# Altium PCB SnekHeaderBoard.PcbDoc
Units mm, origin at the board's own origin, x right, y up, seen from the top; angles counter-clockwise.
Board outline 70 x 40 mm, 2 copper layers (Top Layer, Bottom Layer); 8 components, 17 nets, 54 pads, 0 vias.
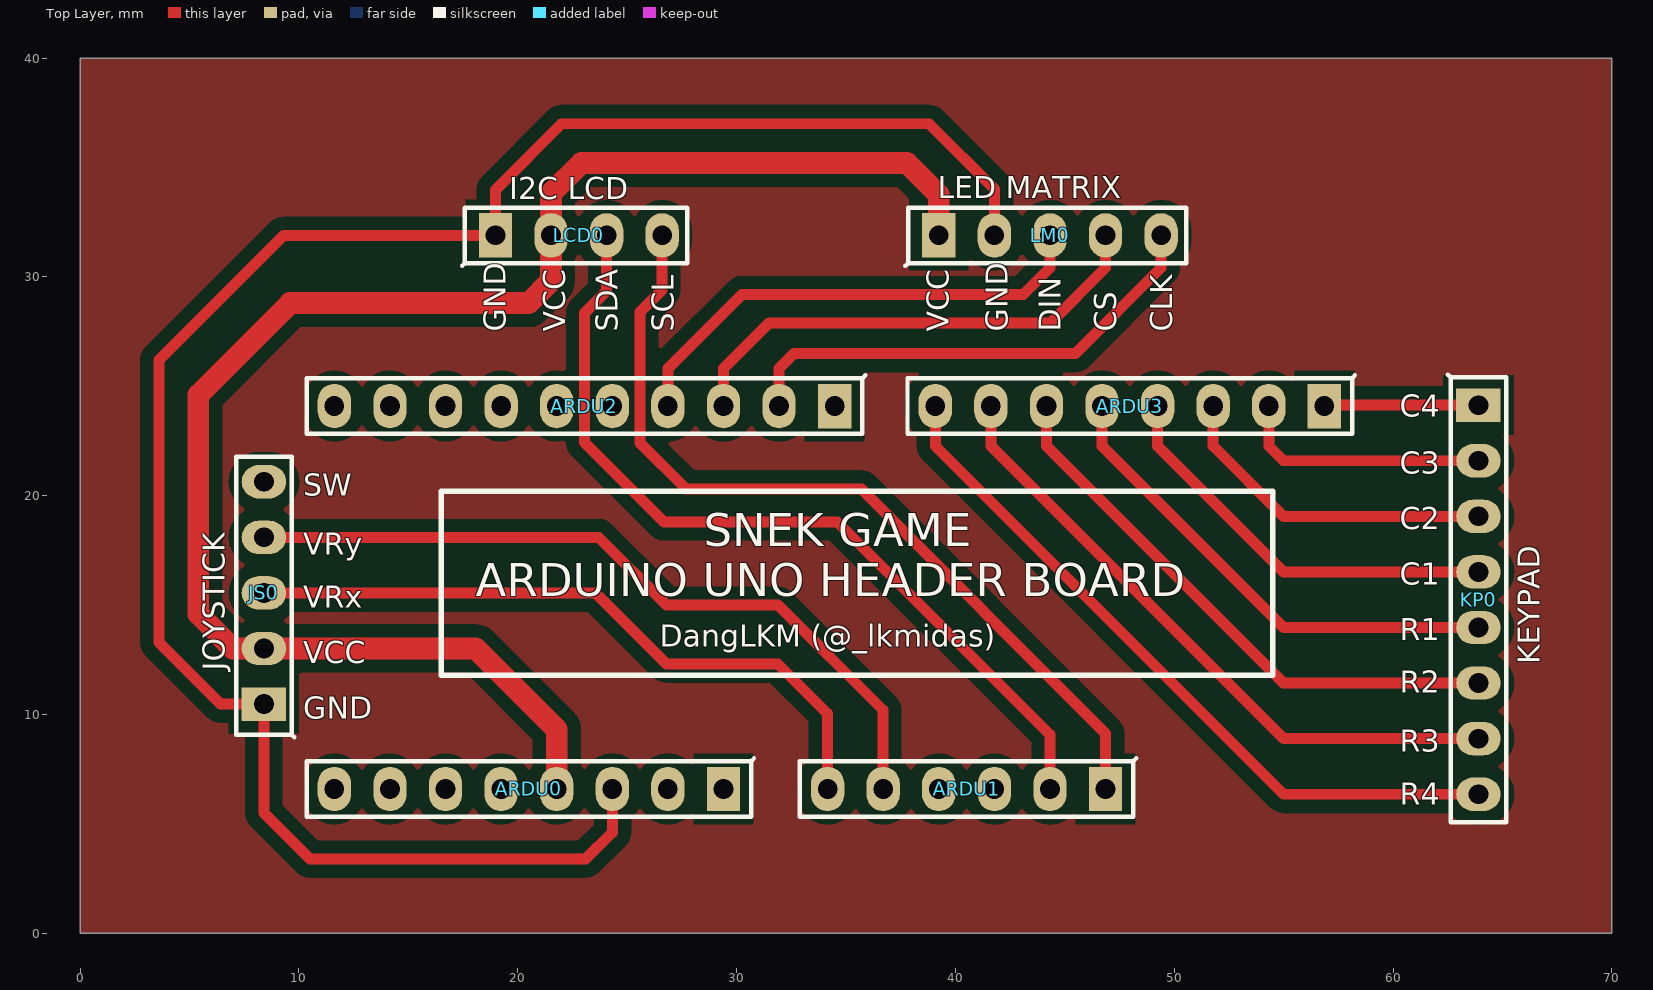
[diagram p0: Top Layer view]
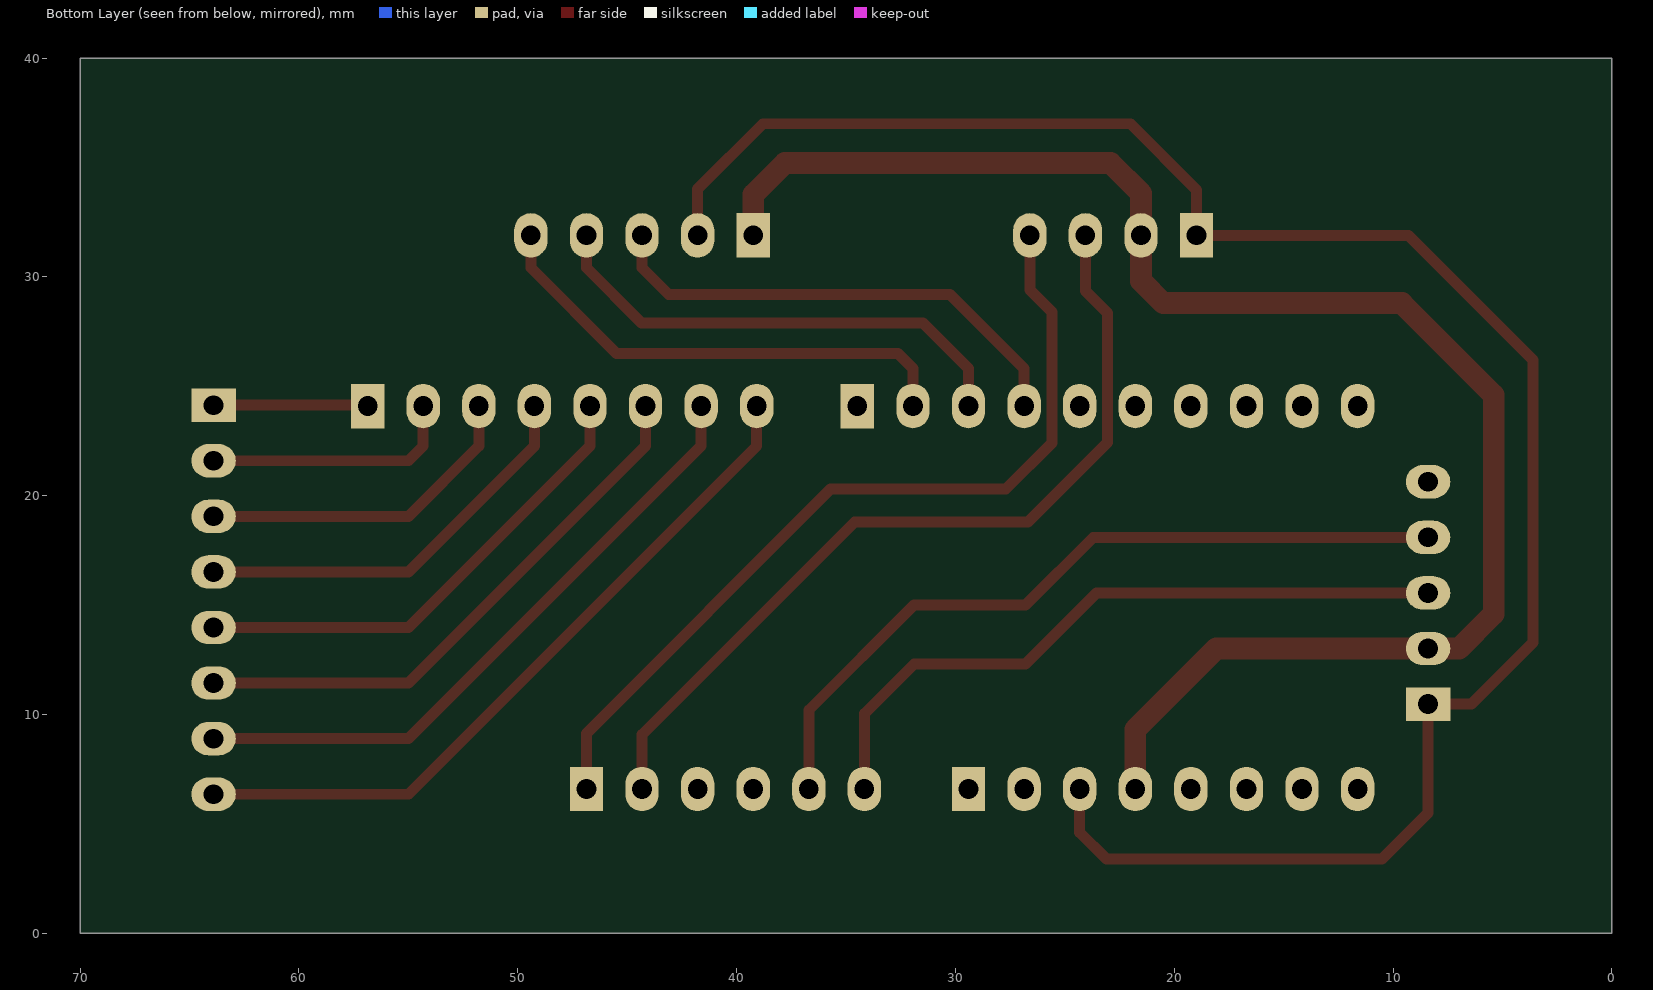
[diagram p1: Bottom Layer view, seen from below]
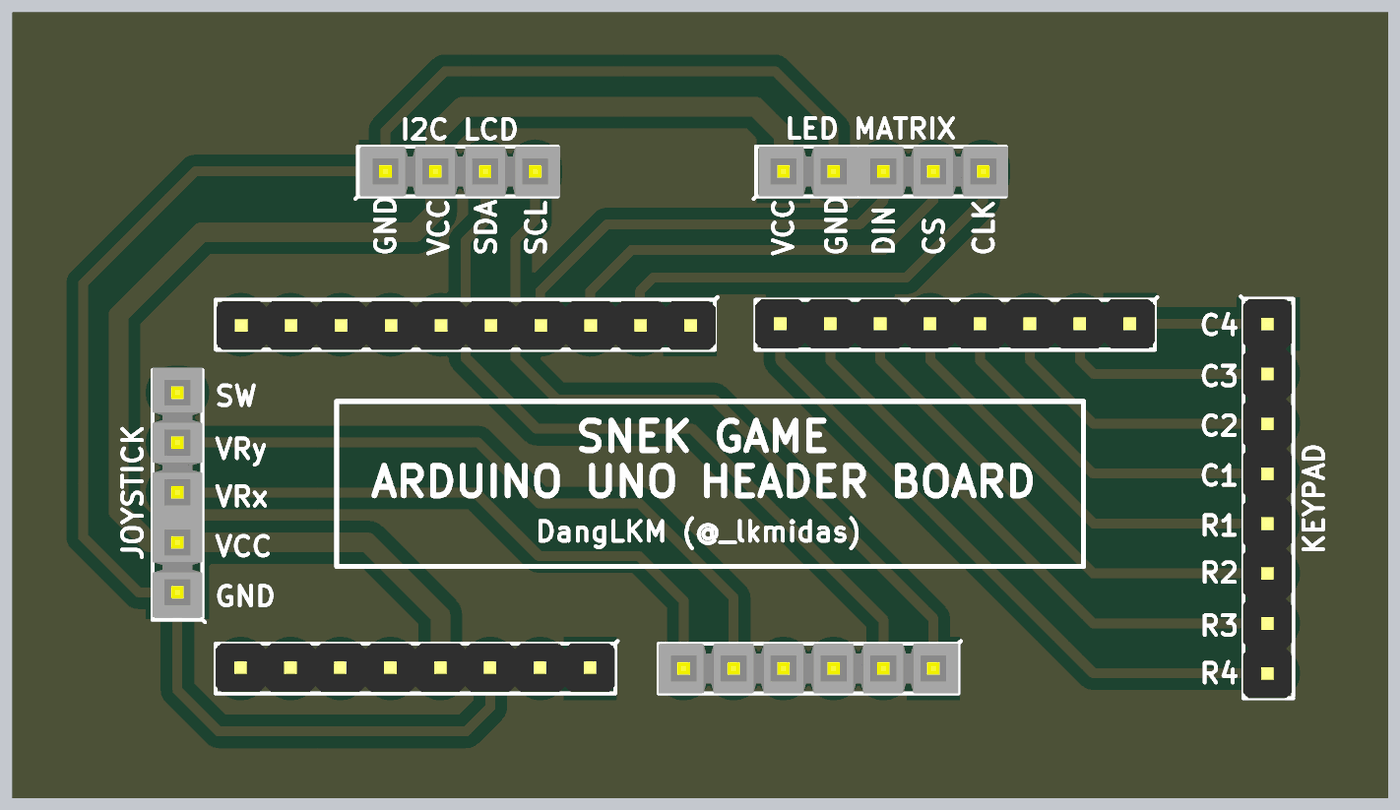
[diagram p2: 3D render of the assembled board from above, using the file's embedded part models]

## Layer stack, top to bottom
Top Solder: solder mask 0.0102, Solder Resist, Dk 3.5
Top Layer: signal copper 0.0356
Dielectric 1: dielectric 0.32, FR-4, Dk 4.8
Bottom Layer: signal copper 0.0356
Bottom Solder: solder mask 0.0102, Solder Resist, Dk 3.5

## Board outline
0,0 0,40 70,40 70,0

## Design rules (kind name [scope] priority, off if disabled: settings)
Clearance [All] p1: gap=0.254 ignorepadtopadclearanceinfootprint=FALSE except(0.6: Arc-Fill Arc-Poly Arc-Region Track-Fill Track-Poly Track-Region SMDPad-Fill SMDPad-Poly SMDPad-Region THPad-Fill THPad-Poly THPad-Region Via-Fill Via-Poly Via-Region Fill-Fill Fill-Poly Fill-Region Poly-Poly Poly-Region Region-Region)
HoleSize [All] p1: absolutevalues=TRUE maxlimit=10 minlimit=0.025 maxpercent=80.000 minpercent=20.000
PolygonConnect [All] p1: connectstyle=Relief reliefconductorwidth=0.254 reliefentries=4 polygonreliefangle="90 Angle" airgapwidth=0.254
RoutingVias [All] p1: holewidth=0.711 width=1.27 viastyle="Through Hole" minholewidth=0.711 minwidth=1.27 maxholewidth=0.711 maxwidth=1.27
SilkToSilkClearance [All] p1 off: silktosilkclearance=0.254
SilkToSolderMaskClearance [IsPad] p1 off: minsilkscreentomaskgap=0.254 clearancetoexposedcopper=TRUE
SolderMaskExpansion [All] p1: expansion=0.102
Width [All] p1: maxlimit=1 minlimit=0.5 preferedwidth=0.5
27 further rules are at their usual default settings.

## Components (designator, comment, footprint, x,y, rotation, side; value= is the part's Value field where it differs from the comment)
ARDU0 "Header 8" "Header 8" 29.4,6.6 r180 top
ARDU1 "Header 6" "Header 6" 46.86,6.6 r180 top
ARDU2 "Header 10" "Header 10" 34.48,24.1 r180 top
ARDU3 "Header 8" "Header 8" 56.86,24.1 r180 top
JS0 "Header 5" "Header 5" 8.4,10.48 r90 top
KP0 "Header 8" "Header 8" 63.9,24.14 r270 top
LCD0 "Header 4" "Header 4" 18.98,31.9 r0 top
LM0 "Header 5" "Header 5" 39.24,31.9 r0 top

## Footprints (in the part's own frame and the unit in brackets; to place one, negate y for a bottom-side part, rotate by r counter-clockwise, add the part's x,y. Pads: shape width x height; smd on the part's side, far side on the other; paste and mask are expansions set on the pad)
"Header 4" [mil]
  rect 60x80 hole 35.43: 1(0,0)
  oval 60x80 hole 35.43: 2(100,0) 3(200,0) 4(300,0)
  silkscreen extent -60,-55 345,50, body extent -50,-50 350,50, height 350
"Header 5" [mil]
  rect 60x80 hole 35.43: 1(0,0)
  oval 60x80 hole 35.43: 2(100,0) 3(200,0) 4(300,0) 5(400,0)
  silkscreen extent -60,-55 445,50, body extent -50,-50 450,50, height 350
"Header 6" [mil]
  rect 60x80 hole 35.43: 1(0,0)
  oval 60x80 hole 35.43: 2(100,0) 3(200,0) 4(300,0) 5(400,0) 6(500,0)
  silkscreen extent -55,-55 550,50, body extent -50,-50 550,50, height 330
"Header 8" [mil]
  rect 60x80 hole 35.43: 1(0,0)
  oval 60x80 hole 35.43: 2(100,0) 3(200,0) 4(300,0) 5(400,0) 6(500,0) 7(600,0) 8(700,0)
  silkscreen extent -55,-55 750,50, body extent -50,-51 750,47, height 336
"Header 10" [mil]
  rect 60x80 hole 35.43: 1(0,0)
  oval 60x80 hole 35.43: 2(100,0) 3(200,0) 4(300,0) 5(400,0) 6(500,0) 7(600,0) 8(700,0) 9(800,0) 10(900,0)
  silkscreen extent -55,-55 950,50, body extent -51,-47 949,51, height 356

## Part data
ARDU0 ARDU3 KP0: "Header, 8-Pin", LatestRevisionDate=17-Jul-2002, LatestRevisionNote="Re-released for DXP Platform.", Publisher="Altium Limited"
ARDU1: "Header, 6-Pin"
ARDU2: "Header, 10-Pin"
JS0 LM0: "Header, 5-Pin", LatestRevisionDate=17-Jul-2002, LatestRevisionNote="Re-released for DXP Platform.", Publisher="Altium Limited"
LCD0: "Header, 4-Pin"

## Nets (pads, with @x,y where several pads share a name; then routed paths per layer and width w, separated by ;. In a path a pad name is that pad's centre, name@x,y a point inside that pad or via, vN(x,y) a via of type N, cw(c..) or ccw(c..) an arc to the next point about the centre after c; other vN are vias at no path point)
C1: ARDU3.4 KP0.4 | length 18.9
  Top Layer w0.5: ARDU3.4 49.24,22.28 55,16.52 KP0.4
C2: ARDU3.3 KP0.3 | length 15.3
  Top Layer w0.5: ARDU3.3 51.78,22.28 55,19.06 KP0.3
C3: ARDU3.2 KP0.2 | length 11.7
  Top Layer w0.5: ARDU3.2 54.32,22.28 55,21.6 KP0.2
C4: ARDU3.1 KP0.1 | length 7.1
  Top Layer w0.5: ARDU3.1 56.9,24.14 KP0.1
CLK: ARDU2.2 LM0.5 | length 22.6
  Top Layer w0.5: ARDU2.2 31.94,25.813 32.627,26.5 45.48,26.5 49.4,30.42 LM0.5
CS: ARDU2.3 LM0.4 | length 22.6
  Top Layer w0.5: ARDU2.3 29.4,25.813 31.487,27.9 44.34,27.9 46.86,30.42 LM0.4
DIN: ARDU2.4 LM0.3 | length 22.6
  Top Layer w0.5: ARDU2.4 26.86,25.813 30.247,29.2 43.1,29.2 44.32,30.42 LM0.3
GND: ARDU0.3 JS0.1 LCD0.1 LM0.2 | length 90.3
  Top Layer w0.5: ARDU0.3 24.32,4.62 23.1,3.4 10.5,3.4 8.4,5.5 JS0.1 6.42,10.48 3.6,13.3 3.6,26.2 9.3,31.9 LCD0.1 18.98,33.98 22,37 38.8,37 41.78,34.02 LM0.2
R1: ARDU3.5 KP0.5 | length 22.5
  Top Layer w0.5: ARDU3.5 46.7,22.28 55,13.98 KP0.5
R2: ARDU3.6 KP0.6 | length 26.1
  Top Layer w0.5: ARDU3.6 44.16,22.28 55,11.44 KP0.6
R3: ARDU3.7 KP0.7 | length 29.6
  Top Layer w0.5: ARDU3.7 41.62,22.28 55,8.9 KP0.7
R4: ARDU3.8 KP0.8 | length 33.2
  Top Layer w0.5: ARDU3.8 39.08,22.28 55,6.36 KP0.8
SCL: ARDU1.1 LCD0.4 | length 39.2
  Top Layer w0.5: LCD0.4 26.6,29.4 25.594,28.394 25.594,22.406 27.7,20.3 35.7,20.3 46.86,9.14 ARDU1.1
SDA: ARDU1.2 LCD0.3 | length 39.2
  Top Layer w0.5: LCD0.3 24.06,29.354 23.054,28.348 23.054,22.426 26.68,18.8 34.6,18.8 44.32,9.08 ARDU1.2
VCC: ARDU0.4 JS0.2 LCD0.2 LM0.1 | length 74.3
  Top Layer w1: ARDU0.4 21.78,9.32 18.08,13.02 JS0.2 6.98,13.02 5.4,14.6 5.4,24.6 9.6,28.8 20.5,28.8 21.52,29.82 LCD0.2 21.52,33.82 22.9,35.2 37.8,35.2 39.24,33.76 LM0.1
VRx: ARDU1.6 JS0.3 | length 31.3
  Top Layer w0.5: JS0.3@8.604,15.56 23.56,15.56 26.8,12.32 31.88,12.32 34.16,10.04 ARDU1.6
VRy: ARDU1.5 JS0.4 | length 35
  Top Layer w0.5: JS0.4@8.604,18.1 23.7,18.1 26.8,15 31.9,15 36.7,10.2 ARDU1.5
pads on no net: ARDU0.1 ARDU0.2 ARDU0.5 ARDU0.6 ARDU0.7 ARDU0.8 ARDU1.3 ARDU1.4 ARDU2.1 ARDU2.5 ARDU2.6 ARDU2.7 ARDU2.8 ARDU2.9 ARDU2.10 JS0.5

## Polygon pours and split planes (outlines as drawn)
no net on Top Layer (solid, pour order 2): 0,0 70,0 70,40 0,40
no net on Top Layer (solid, pour order 0): 0,0

## Silkscreen, mask and mechanical layers (free items; w line width, h text height)
Top Overlay:
  lines w0.254: 16.5,11.8 16.5,20.2 54.5,20.2 54.5,11.8 16.5,11.8
  text "LED MATRIX" at 39.2,33.6 h1
  text "I2C LCD" at 19.62,33.56 h1
  text "GND" at 19.46,27.5 h1 r90
  text "VCC" at 22.16,27.5 h1 r90
  text "SDA" at 24.58,27.5 h1 r90
  text "SCL" at 27.12,27.5 h1 r90
  text "VCC" at 39.7,27.5 h1 r90
  text "GND" at 42.4,27.5 h1 r90
  text "DIN" at 44.82,27.5 h1 r90
  text "CS" at 47.36,27.5 h1 r90
  text "CLK" at 49.9,27.5 h1 r90
  text "C4" at 60.3,23.6 h1
  text "C3" at 60.3,21 h1
  text "SW" at 10.2,20 h1
  text "C2" at 60.3,18.48 h1
  text "SNEK GAME" at 28.5,17.7 h1.5
  text "VRy" at 10.2,17.3 h1
  text "C1" at 60.3,15.94 h1
  text "ARDUINO UNO HEADER BOARD" at 18.08,15.4 h1.5
  text "VRx" at 10.2,14.88 h1
  text "R1" at 60.3,13.4 h1
  text "DangLKM (@_lkmidas)" at 26.5,13.1 h1
  text "VCC" at 10.2,12.34 h1
  text "KEYPAD" at 66.7,12.3 h1 r90
  text "JOYSTICK" at 6.6,12 h1 r90
  text "R2" at 60.3,11 h1
  text "GND" at 10.2,9.8 h1
  text "R3" at 60.3,8.3 h1
  text "R4" at 60.3,5.88 h1